# Altium PCB 4500-WB_AV_MainPCB.PcbDoc
Units mil, origin at the board's own origin, x right, y up, seen from the top; angles counter-clockwise.
Board outline 3845 x 4235 mil, 2 copper layers (Top Layer, Bottom Layer); 50 components, 154 nets, 382 pads, 0 vias.
Unrouted connection lines stored in the file: 187.
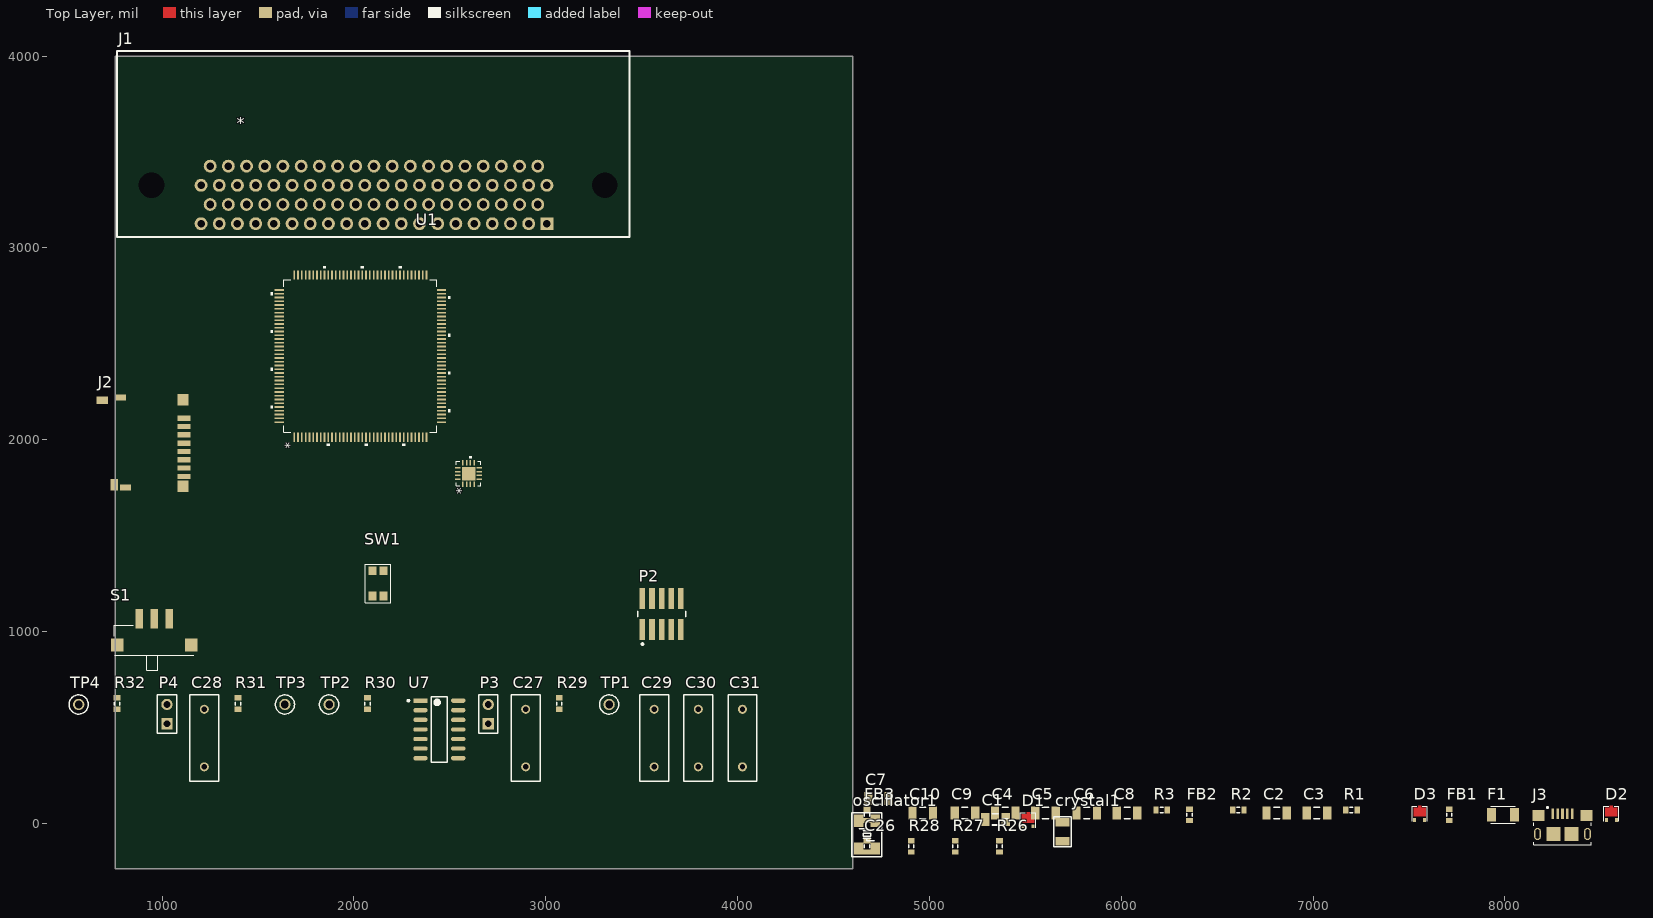
[diagram p0: Top Layer view]
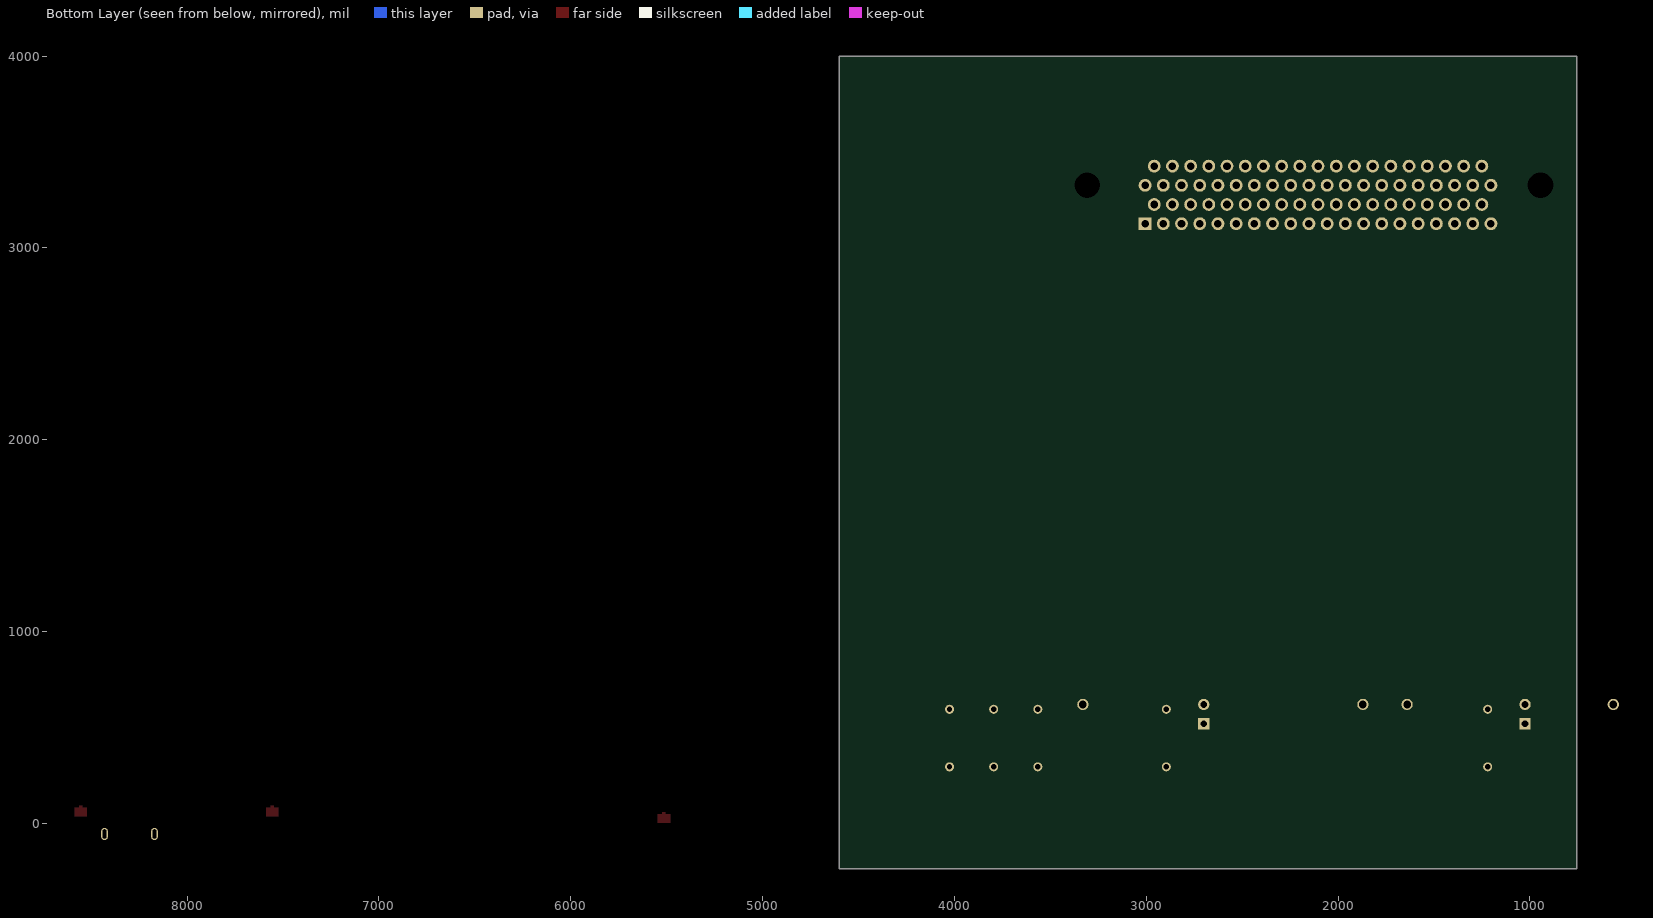
[diagram p1: Bottom Layer view, seen from below]

## Layer stack, top to bottom
Top Solder: solder mask 0.4, Solder Resist, Dk 3.5
Top Layer: signal copper 1.4
Dielectric 1: dielectric 12.6, FR-4, Dk 4.8
Bottom Layer: signal copper 1.4
Bottom Solder: solder mask 0.4, Solder Resist, Dk 3.5

## Board outline
755,-235 4600,-235 4600,4000 755,4000

## Design rules (kind name [scope] priority, off if disabled: settings)
Clearance [All] p1: gap=10 ignorepadtopadclearanceinfootprint=FALSE except(0: Arc-Hole Track-Hole SMDPad-Hole THPad-Hole Via-Hole Fill-Hole Poly-Hole Region-Hole Text-Hole)
PolygonConnect [All] p1: connectstyle=Relief reliefconductorwidth=10 reliefentries=4 polygonreliefangle="90 Angle" airgapwidth=10
RoomDefinition Designator [InComponentClass('Designator')] p1: confinementstyle=ConfineIn formatcopy=TRUE lockcomponents=FALSE outline 4645,85 4825,85 4825,275 4645,275
RoomDefinition Designator [InComponentClass('Designator')] p2: confinementstyle=ConfineIn formatcopy=TRUE lockcomponents=FALSE outline 640.73,-188.62 5755.73,-188.62 5755.73,4041.38 640.73,4041.38
RoomDefinition CAN_bus [InComponentClass('CAN_bus')] p3: confinementstyle=ConfineIn formatcopy=TRUE lockcomponents=FALSE outline 500,205 4115,205 4115,685 500,685
RoutingVias [All] p1: holewidth=28 width=50 viastyle="Through Hole" minholewidth=28 minwidth=50 maxholewidth=28 maxwidth=50
SolderMaskExpansion [All] p1: expansion=4 istentingtop=FALSE
Width [All] p1: maxlimit=10 minlimit=10 preferedwidth=10
30 further rules are at their usual default settings.

## Classes and differential pairs
component class CAN_bus: C27 C28 C29 C30 C31 P3 P4 R29 R30 R31 R32 TP1 TP2 TP3 TP4 U7
component class Designator: * C2 C3 C4 C5 C6 C7 C8 C9 C10 crystal1 D1 D2 D3 F1 FB1 FB2 FB3 J1 J2 J3 oscillator1 P2 R1 R2 R3 S1 SW1 U1

## Components (designator, comment, footprint, x,y, rotation, side; value= is the part's Value field where it differs from the comment)
* "Component_1" 98ASS23177W 2033.88,2436.26 r90 top
C1 "Cap Semi" C1206 5343.88,21.26 r0 top value=0.1uF
C2 "Cap Semi" C1206 6810,55 r0 top value=0.1uF
C3 "Cap Semi" C1206 7020,55 r0 top value=10nF
C4 "Cap Semi" C1206 5395,55 r0 top value=10nF
C5 "Cap Semi" C1206 5605,55 r0 top value=2.2uF
C6 "Cap Semi" C1206 5820,55 r0 top value=2.2uF
C7 "Cap Semi" C1206 4735,130 r0 top value=0.1uF
C8 "Cap Pol3" C1206 6030,55 r0 top value=2.2uF
C9 "Cap Pol3" C1206 5185,55 r0 top value=0.1uF
C10 "Cap Pol3" C1206 4965,55 r0 top value=2.2uF
C26 "Cap" J1-0603 4675,-120 r90 top value=100nF
C27 "Cap" RAD-0.3 2895.32,445 r90 top value=4.7nF
C28 "Cap" RAD-0.3 1220.32,445 r90 top value=4.7nF
C29 "Cap" RAD-0.3 3565.31,445 r90 top value=100pF
C30 "Cap" RAD-0.3 3795.31,445 r90 top value=100pF
C31 "Cap" RAD-0.3 4025.31,445 r90 top value=100pF
crystal1 "SMD_Crystal" ECS-.327-CDX-1128 5693.88,-43.74 r90 top value=32.768kHz
D1 "PMEG4010CPA" *SOT1061 5513.88,16.26 r0 top
D2 "PMEG4010CPA" *SOT1061 8555,50 r0 top
D3 "PMEG4010CPA" *SOT1061 7555,50 r0 top
F1 "500mA" RESC3216X125N 7990,45 r0 top
FB1 "Inductor" J1-0603 7710,45 r90 top value=10mH
FB2 "Inductor" J1-0603 6355,45 r90 top value=10mH
FB3 "Inductor" J1-0603 4675,45 r90 top value=10mH
J1 "Component_1" "SPGA48x11 - duplicate" 3005.87,3126.26 r180 top
J2 "1140084168" *1140084168 679.04,1750.79 r90 top
J3 "10118193-0001LF" FCI_10118193-0001LF_10118193-0001LF(Primary) 8300,-55 r0 top
oscillator1 "SMD_oscillator" ECS-160-8-30B-CKM 4673.88,-58.74 r90 top value=16MHz
P2 "FTSH-105-01-L-DV-K" SMTC-FTSH-105-01-L-DV-K_V 3603.88,1091.26 r0 top
P3 "CAN1" HDR1X2 2700.32,520 r90 top
P4 "CAN1" HDR1X2 1025.32,520 r90 top
R1 "Res3" J1-0603 7200,70 r0 top value=470
R2 "Res3" J1-0603 6610,70 r0 top value=33
R3 "Res3" J1-0603 6210,70 r0 top value=33
R26 "Res1" J1-0603 5365,-120 r90 top value=806
R27 "Res1" J1-0603 5135,-120 r90 top value=1.21k
R28 "Res1" J1-0603 4905,-120 r90 top value=2k
R29 "Res3" J1-0603 3070.32,625 r90 top value=60
R30 "Res3" J1-0603 2070.32,625 r90 top value=60
R31 "Res3" J1-0603 1395.32,625 r90 top value=60
R32 "Res3" J1-0603 765.32,625 r90 top value=60
S1 "SS312SAH4-R" *SW_SS312SAH4-R 958.88,1006.26 r90 top
SW1 "SW-PB" P13348SCT-ND 2097.91,1250.94 r90 top
TP1 "5003" KSTN-5003 3330.31,620 r0 top
TP2 "5003" KSTN-5003 1870.32,620 r0 top
TP3 "5003" KSTN-5003 1640.32,620 r0 top
TP4 "5003" KSTN-5003 565.32,620 r0 top
U1 "Part Number: MKL02Z32VFG4" QFN-16_3X3X0.65 2597.68,1823.48 r90 top value=Value
U7 "TJA1048T,118" FP-SOT108-1-IPC_B 2445.32,490 r0 top

## Footprints (in the part's own frame and the unit in brackets; to place one, negate y for a bottom-side part, rotate by r counter-clockwise, add the part's x,y. Pads: shape width x height; smd on the part's side, far side on the other; paste and mask are expansions set on the pad)
98ASS23177W [mil]
  rect 48x9 smd paste+0 mask+0: 1(-423,344.49) 2(-423,324.8) 3(-423,305.12) 4(-423,285.43) 5(-423,265.75) 6(-423,246.06) 7(-423,226.38) 8(-423,206.69) 9(-423,187.01) 10(-423,167.32) 11(-423,147.64) 12(-423,127.95) 13(-423,108.27) 14(-423,88.58) 15(-423,68.9) 16(-423,49.21) 17(-423,29.53) 18(-423,9.84) 19(-423,-9.84) 20(-423,-29.53) 21(-423,-49.21) 22(-423,-68.9) 23(-423,-88.58) 24(-423,-108.27) 25(-423,-127.95) 26(-423,-147.64) 27(-423,-167.32) 28(-423,-187.01) 29(-423,-206.69) 30(-423,-226.38) 31(-423,-246.06) 32(-423,-265.75) 33(-423,-285.43) 34(-423,-305.12) 35(-423,-324.8) 36(-423,-344.49) 73(423,-344.49) 74(423,-324.8) 75(423,-305.12) 76(423,-285.43) 77(423,-265.75) 78(423,-246.06) 79(423,-226.38) 80(423,-206.69) 81(423,-187.01) 82(423,-167.32) 83(423,-147.64) 84(423,-127.95) 85(423,-108.27) 86(423,-88.58) 87(423,-68.9) 88(423,-49.21) 89(423,-29.53) 90(423,-9.84) 91(423,9.84) 92(423,29.53) 93(423,49.21) 94(423,68.9) 95(423,88.58) 96(423,108.27) 97(423,127.95) 98(423,147.64) 99(423,167.32) 100(423,187.01) 101(423,206.69) 102(423,226.38) 103(423,246.06) 104(423,265.75) 105(423,285.43) 106(423,305.12) 107(423,324.8) 108(423,344.49)
  rect 9x48 smd paste+0 mask+0: 37(-344.49,-423) 38(-324.8,-423) 39(-305.12,-423) 40(-285.43,-423) 41(-265.75,-423) 42(-246.06,-423) 43(-226.38,-423) 44(-206.69,-423) 45(-187.01,-423) 46(-167.32,-423) 47(-147.64,-423) 48(-127.95,-423) 49(-108.27,-423) 50(-88.58,-423) 51(-68.9,-423) 52(-49.21,-423) 53(-29.53,-423) 54(-9.84,-423) 55(9.84,-423) 56(29.53,-423) 57(49.21,-423) 58(68.9,-423) 59(88.58,-423) 60(108.27,-423) 61(127.95,-423) 62(147.64,-423) 63(167.32,-423) 64(187.01,-423) 65(206.69,-423) 66(226.38,-423) 67(246.06,-423) 68(265.75,-423) 69(285.43,-423) 70(305.12,-423) 71(324.8,-423) 72(344.49,-423) 109(344.49,423) 110(324.8,423) 111(305.12,423) 112(285.43,423) 113(265.75,423) 114(246.06,423) 115(226.38,423) 116(206.69,423) 117(187.01,423) 118(167.32,423) 119(147.64,423) 120(127.95,423) 121(108.27,423) 122(88.58,423) 123(68.9,423) 124(49.21,423) 125(29.53,423) 126(9.84,423) 127(-9.84,423) 128(-29.53,423) 129(-49.21,423) 130(-68.9,423) 131(-88.58,423) 132(-108.27,423) 133(-127.95,423) 134(-147.64,423) 135(-167.32,423) 136(-187.01,423) 137(-206.69,423) 138(-226.38,423) 139(-246.06,423) 140(-265.75,423) 141(-285.43,423) 142(-305.12,423) 143(-324.8,423) 144(-344.49,423)
  silkscreen extent -467,-467 467,467, body extent -433,-433 433,433, height 63
*1140084168 [mm]
  rect 0.7x1.75 smd: 1(9.175,-11.038) 6(3.675,-11.038)
  rect 0.701x1.753 smd: 2(8.075,-11.038) 8(1.475,-11.038)
  rect 0.701x1.752 smd: 3(6.975,-11.038) 4(5.875,-11.038) 5(4.775,-11.038) 7(2.575,-11.038)
  rect 1.501x1.501 smd: 9(0.175,-10.913)
  rect 1.502x1.502 smd: 10(11.625,-10.913)
  rect 0.801x1.501 smd: 11(0,-3.313)
  rect 0.8x1.401 smd: 12(11.95,-2.663)
  rect 1.5x1 smd: 13(0.355,-1.813)
  rect 1.001x1.502 smd: 14(11.55,-0.213)
  body extent -0.06,-11.33 11.96,0.17, height 1.55
*SOT1061 [mm]
  rect 0.4x0.5 smd: 1(-0.65,-0.8) 2(0.65,-0.8)
  rect 0x0 all layers, no hole: 3(0,0.875)
  Top Layer region: 0.8,-0.3 -0.8,-0.3 -0.8,0.8 -0.2,0.8 -0.2,1.05 0.2,1.05 0.2,0.8 0.8,0.8
  silkscreen extent -1,-1 1,1
*SW_SS312SAH4-R [mm]
  rect 2.55x1 smd: 1(1.525,-2) 2(1.525,0) 3(1.525,2)
  rect 1.7x1.7 smd: P$1(-1.95,-4.9) P$2(-1.95,4.9)
  silkscreen extent -5.3,-5.25 0.7,5.3, body extent -5.27,-5.25 2.12,5.25, height 3.1
C1206 [mm] "Chip Capacitor, Body 3.2x1.6mm, IPC High Density"
  rect 1.1x1.7 smd: 1(-1.35,0) 2(1.35,0)
  silkscreen extent -0.4,-0.75 0.4,0.75, body extent -1.7,-0.9 1.7,0.9, height 1.3
ECS-160-8-30B-CKM [mm] "ECS-160-8-30B-CKM"
  rect 1.6x1.25 smd paste+0 mask+0.05: 1(-1.85,-1.1) 2(1.85,-1.1) 3(1.85,1.1) 4(-1.85,1.1)
  silkscreen extent -2.9,-2 2.9,2, body extent -2.5,-1.6 2.5,1.6, height 0.85
ECS-.327-CDX-1128 [mm] "ECS-.327-CDX-1128"
  rect 1.1x1.9 smd paste+0 mask+0.05: 1(-1.25,0) 2(1.25,0)
  silkscreen extent -2,-1.15 2,1.15, body extent -1.6,-0.75 1.6,0.75, height 0.9
FCI_10118193-0001LF_10118193-0001LF(Primary) [mm]
  rect 0.344x1.35 smd mask+0.076: 1(-1.3,2.675) 2(-0.65,2.675) 3(0,2.675) 4(0.65,2.675) 5(1.3,2.675)
  rect 1.6x1.4 smd: S1(-3.2,2.45) S2(3.2,2.45)
  rect 1.9x1.9 smd: S3(1.2,0) S4(-1.2,0)
  oval 0.9x1.6 hole 0.5 slot 1.2 at 90 deg: S5(-3.3,0) S6(3.3,0)
  silkscreen extent -3.8,-1.45 3.8,3.6, body extent -3.95,-2.75 3.9,2.91, height 3.18
FP-SOT108-1-IPC_B [mil]
  rect 74.98x22.36 smd paste+0 mask+0: 1(-98.46,150)
  rrect100% 74.98x22.36 smd paste+0 mask+0: 2(-98.46,100) 3(-98.46,50) 4(-98.46,0) 5(-98.46,-50) 6(-98.46,-100) 7(-98.46,-150) 8(98.46,-150) 9(98.46,-100) 10(98.46,-50) 11(98.46,0) 12(98.46,50) 13(98.46,100) 14(98.46,150)
  silkscreen extent -166,-170 41,170, body extent -146,-180 146,180, height 10
HDR1X2 [mm] "Connector; Header; 2 Position"
  rect 1.5x1.5 hole 0.9: 1(0,0)
  round 1.5 hole 0.9: 2(2.54,0)
  silkscreen extent -1.27,-1.27 3.81,1.27
J1-0603 [mm] "Chip Resistor, Body 1.6x0.8mm, IPC High Density"
  rect 0.7x0.9 smd: 1(-0.75,0) 2(0.75,0)
  silkscreen extent -0.2,-0.35 0.2,0.35, body extent -0.85,-0.48 0.85,0.48, height 0.9
KSTN-5003 [mm] "Test Point, Through Hole, Dia 2.54mm"
  round 1.5 hole 1: 1(0,0)
  silkscreen extent -1.27,-1.27 1.27,1.27, body extent -1.27,-1.27 1.27,1.27, height 4.57
P13348SCT-ND [mm]
  rect 1.15x1.05 smd: 1(-1.675,0) 1(1.675,0) 2(-1.675,-1.45) 2(1.675,-1.45)
  silkscreen extent -2.54,-2.41 2.54,1.02
QFN-16_3X3X0.65 [mm]
  rect 0.755x0.198 smd paste+0 mask+0: 1(-1.427,0.75) 2(-1.427,0.25) 3(-1.427,-0.25) 4(-1.427,-0.75) 9(1.427,-0.75) 10(1.427,-0.25) 11(1.427,0.25) 12(1.427,0.75)
  rect 0.198x0.755 smd paste+0 mask+0: 5(-0.75,-1.427) 6(-0.25,-1.427) 7(0.25,-1.427) 8(0.75,-1.427) 13(0.75,1.427) 14(0.25,1.427) 15(-0.25,1.427) 16(-0.75,1.427)
  rect 1.8x1.8 smd paste-0.887 mask+0: 17(0,0)
  silkscreen extent -1.63,-1.63 2.31,1.63, body extent 0,0 0.25,0.25, height 0.25
RAD-0.3 [mm] "Radial Cap, Thru-Hole; 2 Leads; 0.3 in Pin Spacing"
  round 1.2 hole 0.7: 1(-3.81,0) 2(3.81,0)
  silkscreen extent -5.71,-1.91 5.71,1.91
RESC3216X125N [mm]
  rect 1.2x1.82 smd: 1(-1.505,0) 2(1.505,0)
  silkscreen extent -1.62,-1.14 1.64,1.14, body extent -1.62,-0.82 1.63,0.83, height 0.43
SMTC-FTSH-105-01-L-DV-K_V [mm] "CONN, 10-Leads, Body 6.35x3.43mm, Pitch 1.27mm"
  rect 0.74x2.79 smd: 1(-2.54,-2.035) 2(-2.54,2.035) 3(-1.27,-2.035) 4(-1.27,2.035) 5(0,-2.035) 6(0,2.035) 7(1.27,-2.035) 8(1.27,2.035) 9(2.54,-2.035) 10(2.54,2.035)
  silkscreen extent -3.17,-4.1 3.17,0.34, body extent -3.17,-2.92 3.18,2.92, height 6.12
"SPGA48x11 - duplicate" [mm]
  rect 1.7x1.7 hole 1: 1(0,0)
  round 1.7 hole 1: 2(1.205,-2.54) 3(2.41,0) 4(3.615,-2.54) 5(4.82,0) 6(6.025,-2.54) 7(7.23,0) 8(8.435,-2.54) 9(9.64,0) 10(10.845,-2.54) 11(12.05,0) 12(13.255,-2.54) 13(14.46,0) 14(15.665,-2.54) 15(16.87,0) 16(18.075,-2.54) 17(19.28,0) 18(20.485,-2.54) 19(21.69,0) 20(22.895,-2.54) 21(24.1,0) 22(25.305,-2.54) 23(26.51,0) 24(27.715,-2.54) 25(28.92,0) 26(30.125,-2.54) 27(31.33,0) 28(32.535,-2.54) 29(33.74,0) 30(34.945,-2.54) 31(36.15,0) 32(37.355,-2.54) 33(38.56,0) 34(39.765,-2.54) 35(40.97,0) 36(42.175,-2.54) 37(43.38,0) 38(44.585,-2.54) 39(45.79,0) 40(0,-5.08) 41(1.205,-7.62) 42(2.41,-5.08) 43(3.615,-7.62) 44(4.82,-5.08) 45(6.025,-7.62) 46(7.23,-5.08) 47(8.435,-7.62) 48(9.64,-5.08) 49(10.845,-7.62) 50(12.05,-5.08) 51(13.255,-7.62) 52(14.46,-5.08) 53(15.665,-7.62) 54(16.87,-5.08) 55(18.075,-7.62) 56(19.28,-5.08) 57(20.485,-7.62) 58(21.69,-5.08) 59(22.895,-7.62) 60(24.1,-5.08) 61(25.305,-7.62) 62(26.51,-5.08) 63(27.715,-7.62) 64(28.92,-5.08) 65(30.125,-7.62) 66(31.33,-5.08) 67(32.535,-7.62) 68(33.74,-5.08) 69(34.945,-7.62) 70(36.15,-5.08) 71(37.355,-7.62) 72(38.56,-5.08) 73(39.765,-7.62) 74(40.97,-5.08) 75(42.175,-7.62) 76(43.38,-5.08) 77(44.585,-7.62) 78(45.79,-5.08)
  round 1.524 hole 3.4: 7(-7.665,-5.08) 7(52.35,-5.08)
  silkscreen extent -10.92,-22.86 56.9,1.78, body extent -10.71,-22.68 56.69,1.52, height 16.87

## Part data
C1 C2 C3 C4 C5 C6 C7: "Capacitor (Semiconductor SIM Model)", LatestRevisionDate=29-May-2009, LatestRevisionNote="IPC-7351 Footprint Added.", PackageDescription="Chip Capacitor", PackageReference=C1206, Published=8-Jun-2000, Publisher="Altium Limited"
  C1 C2 C7: SPN=1276-1017-1-ND
  C3 C4: SPN=1276-2735-1-ND
  C5 C6: SPN=311-3513-1-ND
C8 C9 C10: "Polarized Capacitor (Surface Mount)", LatestRevisionDate=29-May-2009, LatestRevisionNote="IPC-7351 Footprint Added.", PackageDescription="Chip Capacitor", PackageReference=C0805, Published=8-Jun-2000, Publisher="Altium Limited"
  C8 C10: SPN=311-3513-1-ND
  C9: SPN=1276-1017-1-ND
C26 C27 C28 C29 C30 C31: "Capacitor", LatestRevisionDate=17-Jul-2002, LatestRevisionNote="Re-released for DXP Platform.", PackageDescription="Radial Cap, Thru-Hole; 2 Leads; 0.3 in Pin Spacing", PackageReference=RAD-0.3, Published=8-Jun-2000, Publisher="Altium Limited"
crystal1: library part ECS-.327-CDX-1128, SPN=XC2190CT-ND
D1 D2 D3: "DIODE, DUAL, SCH, 40V, 1A, SOT1061; Diode Type: Schottky; Diode Configuration: Dual, Common Cathode; Repetitive Rever...", Package="PowerUDFN-3 Nexperia USA", Digi-Key_Part_Number=1727-5212-1-ND, Digi-Key_Purchase_URL=https://www.digikey.ca/product-detail/en/nexperia-usa-inc/PMEG4010CPASX/1727-2405-1-ND/5436151?utm_source=snapeda&utm_medium=aggregator&utm_campaign=symbol, MF="Nexperia USA", MP=PMEG4010CPA, SnapEDA_Link=https://www.snapeda.com/parts/PMEG4010CPA/Nexperia%20USA%20Inc./view-part/?ref=snap
F1: library part "Fuse 2", "Fuse", LatestRevisionDate=17-Jul-2002, LatestRevisionNote="Re-released for DXP Platform.", PackageDescription="Thru-Hole; 2 Leads", PackageReference=PIN-W2/E2.8, Published=8-Jun-2000, Publisher="Altium Limited", SPN=507-1797-1-ND
J2: "Conn; IC Socket; Micro SD; Right Angle; PCB Mount; MicroSD Ser.", Package=None, Digi-Key_Part_Number=114-00841-68-1-ND, Digi-Key_Purchase_URL=https://www.digikey.ca/product-detail/en/amphenol-icc-commercial-products/114-00841-68/114-00841-68-1-ND/2187101?utm_source=snapeda&utm_medium=aggregator&utm_campaign=symbol, MF="Amphenol ICC", MP=1140084168, SnapEDA_Link=https://www.snapeda.com/parts/1140084168/Amphenol%20ICC/view-part/?ref=snap
J3: "Single Port 5 Contact Shielded SMT MICRO USB B-Type Receptacle", Package=None, Digi-Key_Part_Number=609-4616-1-ND, Digi-Key_Purchase_URL=https://www.digikey.ca/product-detail/en/amphenol-fci/10118193-0001LF/609-4616-1-ND/2785380?utm_source=snapeda&utm_medium=aggregator&utm_campaign=symbol, MF="Amphenol FCI", MP=10118193-0001LF, SnapEDA_Link=https://www.snapeda.com/parts/10118193-0001LF/Amphenol%20FCI/view-part/?ref=snap
oscillator1: library part ECS-160-8-30B-CKM, SPN=XC1839CT-ND
P2: library part CMP-2000-05353-1, "Male Header, Pitch 1.27 mm, 2 x 5 Position, Height 6.25 mm", Color=Black, Manufacturer=Samtec, Package Description="Male Header, Pitch 1.27 mm, 2 x 5 Position, Height 5.97 mm, Tail Length 4.32 mm", Standard Package=1, Category=Connectors,Interconnects, Connector Type=Header,Unshrouded, Contact Finish=Gold, Contact Finish Thickness=10µin(0.25µm), Contact Mating Length="0.120\"(3.05mm)", Contact Type=MalePin, Datasheet URL=http://suddendocs.samtec.com/prints/ftsh-1xx-xx-xxx-dv-xxx-mkt.pdf, Datasheet Version="Rev. ET, 10/1995", Family=RectangularConnectors-Headers,MalePins, Manufacturer URL=http://www.samtec.com/, Mating Products="SFMC-105-L2-S-D-TR-ND / -CONN.05\"SURFACE10POSSMT / FLE-105-01-G-DV-TR-ND / -CONNSKT1.27MM10POSDUALSMD / FLE-105-01-G-DV-A-P-ND / -CONNSKT1.27MM10POSDUALSMD / FLE-105-01-G-DV-A-ND / -CONNSKT1.27MM10POSDUALSMD / CLP-105-02-G-D-P-TR-ND / -CONNRCPT10POSDUAL.05\"SMD / SAM1155-05-ND / -CONNRCPT10POSDUAL.05\"SMD / SAM1154-05-ND / -CONNRCPT10POSDUAL.05\"SMD / SAM1153-05-ND / -CONNRCPT10POSDUAL.05\"SMD / SAM1226-05-ND / -CONNRCPT.05\"10POSDUALSMD", Mounting Type=SurfaceMount, Number of Positions=10, Number of Positions Loaded=All, Number of Rows=2, Other Names=Q3937619, Package Reference=FTSH-105-01-L-DV-K, Package URL=http://suddendocs.samtec.com/prints/ftsh-1xx-xx-xxx-dv-xxx-footprint.pdf, Packaging=Tube, Pitch="0.050\"(1.27mm)", Product Training Modules=Board-to-BoardConnectors, Row Spacing="0.050\"(1.27mm)", Series=FTSH, Termination=Solder
P3 P4: library part "Header 2", "Header, 2-Pin", LatestRevisionDate=17-Jul-2002, LatestRevisionNote="Re-released for DXP Platform.", Publisher="Altium Limited"
R1 R2 R3 R26 R27 R28 R29 R30 R31 R32: "Resistor", Published=8-Jun-2000, Publisher="Altium Limited"
  R1: LatestRevisionDate=29-May-2009, LatestRevisionNote="IPC-7351 Footprint Added.", PackageDescription="Chip Resistor", PackageReference=J1-0603, SPN=RHM470ADCT-ND
  R2 R3: LatestRevisionDate=29-May-2009, LatestRevisionNote="IPC-7351 Footprint Added.", PackageDescription="Chip Resistor", PackageReference=J1-0603, SPN=541-2782-1-ND
  R26 R27 R28: LatestRevisionDate=17-Jul-2002, LatestRevisionNote="Re-released for DXP Platform.", PackageDescription="Axial Device, Thru-Hole; 2 Leads; 0.3 in Pin Spacing", PackageReference=AXIAL-0.3
  R29 R30 R31 R32: LatestRevisionDate=29-May-2009, LatestRevisionNote="IPC-7351 Footprint Added.", PackageDescription="Chip Resistor", PackageReference=J1-0603
S1: "Switch Slide ON None ON SPDT Side Slide 0.1A 28VAC 28VDC 0.4VA 10000Cycles Gull Wing SMD T/R", Package=None, Availability=Unavailable, MF="NKK Switches", MP=SS312SAH4-R, Price=None, SnapEDA_Link=https://www.snapeda.com/parts/SS312SAH4-R/NKK%20Switches/view-part/?ref=snap
SW1: "Switch", LatestRevisionDate=17-Jul-2002, LatestRevisionNote="Re-released for DXP Platform.", PackageDescription="Switch; 2 Leads", PackageReference=SPST-2, Published=24-Mar-1999, Publisher="Altium Limited"
TP1 TP2 TP3 TP4: library part CMP-1672-00009-1, "Test Point, Orange, 1-Pin THD, RoHS", Forward Current="3 A", Forward Voltage="1.08 V", Max Operating Temperature="150 degC", Max Surge Current="80 A", Min Operating Temperature="-65 degC", Package Quantity=500, Peak Reverse Current="600 uA", ComponentLink1Description="Manufacturer URL", ComponentLink1URL=http://www.keyelco.com/, ComponentLink2Description=Datasheet, ComponentLink2URL=http://keyelco.com/userAssets/file/M65p56.pdf, DatasheetVersion=Jun-15, Diameter="5.3 mm", Height="0.25 inch", Length="9.5 mm", Mount="Through Hole", PackageDescription="1-Pin Through Hole Device, Dia 2.54 mm", PackageReference=5003, Packaging=Bulk, Pins=2, Radiation Hardening=No, REACH SVHC="No SVHC", RoHSCompliant=true, Weight="0.01 lb", Width="0.25 inch"
U1: library part MKL02Z32VFG4, "No Description Available", Max_Frequency=48, Package=QFN, ComponentLink1Description="Order from here", ComponentLink1URL=https://www.pjrc.com/store/ic_mkl02.html, Copyright="Copyright (C) 2016 Accelerated Designs. All rights reserved", CPU="ARM Cortex-M0+", Flash_KB=32, Manufacturer_Part_Number=MKL02Z32VFG4, Pin_Count=16, RefDes=RefDes, SRAM_KB=4, Type=DEV, Vendor=NXP
U7: library part CMP-10098-000027-1, "IC TRANSCEIVER HALF 2/2 14SO", Case/Package=SO, Max Operating Temperature=125°C, Max Supply Voltage=5.5V, Min Operating Temperature=-40°C, Min Supply Voltage=4.5V, Nominal Supply Current=140mA, Package Quantity=1, Quiescent Current=500nA, Data Rate=1Mbps, Interface=CAN, Lead Free="Lead Free", Mount="Surface Mount", Number of Drivers=2, Number of Pins=14, Number of Receivers=2, Number of Transceivers=2, Operating Supply Current=140mA, Packaging="Tape and Reel", Propagation Delay=250ns, Radiation Hardening=No, Weight=0.009143oz
FB1 FB2 FB3: Code_IEC=1005, Code_JEITA=0402, LatestRevisionDate=29-May-2009, LatestRevisionNote="IPC-7351 Footprint Added.", PackageDescription="Chip Inductor", PackageReference=0402-A, Published=8-Jun-2000, Publisher="Altium Limited", SPN=490-1037-1-ND

## Nets (pads, with @x,y where several pads share a name; then routed paths per layer and width w, separated by ;. In a path a pad name is that pad's centre, name@x,y a point inside that pad or via, vN(x,y) a via of type N, cw(c..) or ccw(c..) an arc to the next point about the centre after c; other vN are vias at no path point)
3.3V: *.5 *.16 *.135 C2.2 C3.2 C4.2 C5.2 C10.1 C31.2 D1.2 FB1.1 J1.76 J2.4 P2.10 U1.1 U7.11
+5: C26.2 C29.2 C30.2 U7.3
+12: D2.1
ADC0_DM0: *.28 J1.8
ADC0_SE21: *.36 J1.14
ADC0_SE22: *.35 J1.13
ADC0_SE23: J1.16
ADC1_DM0: *.30 J1.10
ADC1_DP0: *.29 J1.9
ADC1_SE18: J1.15
ADC1_SE23: J1.17
BSWDIO: S1.3 U1.7
CAN1_RX: *.46 U7.4
CAN1_STBN: U7.14
CAN1_TX: *.45 U7.1
CAN2_RX: *.123 U7.7
CAN2_STBN: U7.8
CAN2_TX: *.124 U7.6
CANH1: P3.2 P4.2 R30.1 R32.1 TP2.1 TP4.1 U7.13
CANH2: U7.10
CANL1: P3.1 P4.1 R29.2 R31.2 TP1.1 TP3.1 U7.12
CANL2: U7.9
CS0: *.109
GND: *.134 C1.1 C2.1 C3.1 C4.1 C5.1 C8.2 C9.2 C10.2 C26.1 C27.2 C28.2 C29.1 C30.1 C31.1 FB2.2 J1.1 J1.77 J2.6 J2.9 J2.10 J2.11 J2.12 J3.5 J3.S1 J3.S2 J3.S3 J3.S4 J3.S5 J3.S6 P2.8 R27.1 SW1.1 U1.2 U1.17 U7.2 U7.5
MISO0: *.112 R28.1
MOSI0: *.111
Net*_40: *.40 crystal1.1
Net*_41: *.41 crystal1.2
Net*_72: *.72 oscillator1.1
Net*_73: *.73 oscillator1.3
NetC1_2: C1.2 D1.3
NetC8_1: C8.1 D2.3 F1.1
NetC9_1: C9.1 D3.3
NetC27_1: C27.1 R29.1 R30.2
NetC28_1: C28.1 R31.1 R32.2
NetD3_1: D3.1 D3.2 FB3.2
NetF1_2: F1.2 FB3.1
NetJ3_2: J3.2 R2.1
NetJ3_3: J3.3 R3.1
NetP2_9: P2.9 S1.1
NetR26_1: R26.1
NetR26_2: R26.2 R27.2
NetR28_2: R28.2
NetSW1_2: SW1.2 U1.10
PTA0: *.50 P2.7 U1.8
PTA1: *.51 U1.6
PTA2: *.52 P2.5 U1.9
PTA3: *.53 S1.2
PTA4: *.54
PTA5: *.55 J1.21
PTA6: *.58
PTA7: *.59 J1.22
PTA8: *.60 J1.23
PTA9: *.61
PTA10: *.62
PTA11: *.63
PTA12: *.64 J1.24
PTA13: *.65 J1.25
PTA14: *.66 J1.26
PTA15: *.67 J1.27
PTA16: *.68 J1.28
PTA17: *.69 J1.29
PTA24: *.75
PTA25: *.76
PTA26: *.77 J1.30
PTA27: *.78
PTA28: *.79 J1.31
PTA29: *.80 J1.32
PTB0: *.81 J1.33
PTB1: *.82 J1.34
PTB2: *.83 J1.35
PTB3: *.84 J1.36
PTB4: *.85 J1.37
PTB5: *.86 J1.38
PTB6: *.87 J1.39
PTB7: *.88 J1.40
PTB8: *.89
PTB9: *.90
PTB10: *.91 J1.41
PTB11: *.92 J1.42
PTB16: *.95 J1.43
PTB17: *.96 J1.44
PTB18: *.97 J1.45
PTB19: *.98 J1.46
PTB20: *.99 J1.47
PTB21: *.100 J1.48
PTB22: *.101 J1.49
PTB23: *.102 J1.50
PTC0: *.103 J1.51
PTC1: *.104 J1.52
PTC2: *.105 J1.53
PTC3: *.106 J1.54
PTC4: J1.55
PTC6: J1.56
PTC7: J1.57
PTC8: *.113 J1.58
PTC9: *.114 J1.59
PTC10: *.115 J1.60
PTC11: *.116 J1.61
PTC12: *.117
PTC13: *.118
PTC14: *.119
PTC15: *.120
PTC18: *.125
PTC19: *.126
PTD0: *.127 J1.62
PTD1: *.128 J1.63
PTD2: *.129 J1.64
PTD3: *.130
PTD4: *.131 J1.65
PTD5: *.132 J1.66
PTD6: *.133 J1.67
PTD7: *.136 J1.68
PTD8: *.137 J1.69
PTD9: *.138 J1.70
PTD10: *.139
PTD11: *.140 J1.71
PTD12: *.141 J1.72
PTD13: *.142 J1.73
PTD14: *.143 J1.74
PTD15: *.144 J1.75
PTE0: *.1 J1.2 J2.8
PTE1: *.2 J1.3 J2.7
PTE2: *.3 J1.4 J2.5
PTE3: *.4 J1.5 J2.3
PTE4: *.7 J2.2
PTE5: *.8 J2.1
PTE6: *.9
PTE7: *.10
PTE8: *.11
PTE9: *.12
PTE10: *.13 J1.6
PTE11: *.14 J1.7
PTE12: *.15
PTE24: J1.18
PTE25: J1.19
PTE26: *.47 J1.20
PTE27: *.48
PTE28: *.49
Reset_b: *.74 P2.1 U1.4 U1.13
SCK0: *.110
USB0_DM: *.20 R2.2
USB0_DP: *.19 R3.2
USB1_VSS: *.24
VBAT: D1.1
VDDA: *.31 C6.2 FB1.2 R1.2
VREFH: *.32 C7.2 J1.11 R1.1
VREFL: *.33 J1.12
VREG_IN0: *.22
VREG_IN1: *.23
VREG_OUT: *.21
VSS: *.6 *.17 *.18
VSSA: *.34 C6.1 C7.1 FB2.1
VUSB: D2.2 J3.1
pads on no net: *.25 *.26 *.27 *.37 *.38 *.39 *.42 *.43 *.44 *.56 *.57 *.70 *.71 *.93 *.94 *.107 *.108 *.121 *.122 J1.78 J2.13 J2.14 J3.4 oscillator1.2 oscillator1.4 P2.2 P2.3 P2.4 P2.6 S1.P$1 S1.P$2 U1.3 U1.5 U1.11 U1.12 U1.14 U1.15 U1.16

## Text inside footprints (layer, text, board x,y; h text height)
*: Mechanical 7 "Default Horiz Padstyle: RX9Y48D0T" at 2716.88,2023.76 h50 r90; Mechanical 7 "Default Vert Padstyle: RX9Y48D0T" at 2776.88,2036.26 h50 r90; Mechanical 7 "Alt 1 Padstyle: OX60Y90D30P" at 2956.88,2098.76 h50 r90; Mechanical 7 "Alt 2 Padstyle: OX90Y60D30P" at 3016.88,2098.76 h50 r90; Mechanical 7 "0.02in/0.5mm" at 1711.74,2989.26 h25 r90; Mechanical 7 "0.02in/0.508mm" at 1480.88,2771.76 h25 r90; Mechanical 7 "0.866in/21.996mm" at 1405.88,2336.26 h25 r90; Mechanical 7 "0.787in/19.99mm" at 2611.88,2342.51 h25 r90; Mechanical 7 "0.787in/19.99mm" at 2046.38,1695.76 h25 r90; Mechanical 7 "0.866in/21.996mm" at 2046.38,3064.26 h25 r90
U1: Top Overlay "*" at 2583.31,1714.92 h50 r90; Mechanical 7 "0.118in/3mm" at 2832.74,1754.73 h25 r90; Mechanical 7 "0.118in/3mm" at 2610.18,1475.92 h25 r90; Mechanical 7 "0.118in/3mm" at 2610.18,2083.53 h25 r90; Mechanical 7 "0.118in/3mm" at 2337.63,1754.73 h25 r90; Mechanical 7 "0.018in/0.45mm" at 2412.63,1786.18 h25 r90; Mechanical 7 "0.02in/0.5mm" at 2590.5,2008.53 h25 r90; Mechanical 7 "Alt 2 Padstyle: OX90Y60D30P" at 3218.74,1485.98 h50 r90; Mechanical 7 "Alt 1 Padstyle: OX60Y90D30P" at 3158.74,1485.98 h50 r90; Mechanical 7 "Heat Tab Padstyle: RX70p87Y70p87D0T" at 3038.74,1385.98 h50 r90; Mechanical 7 "Default Padstyle: RX7p81Y29p72D0T" at 2978.74,1410.98 h50 r90; Mechanical 13 "*" at 2583.31,1769.64 h50 r90